# Altium PCB mRo_CANnode_V1_R1.PcbDoc
Units mm, origin at the board's own origin, x right, y up, seen from the top; angles counter-clockwise.
Board outline 25.25 x 21 mm, 4 copper layers (Top Layer, GND, VDD, Bottom Layer), stack 1.167 mm thick; 60 components, 35 nets, 197 pads, 80 vias.
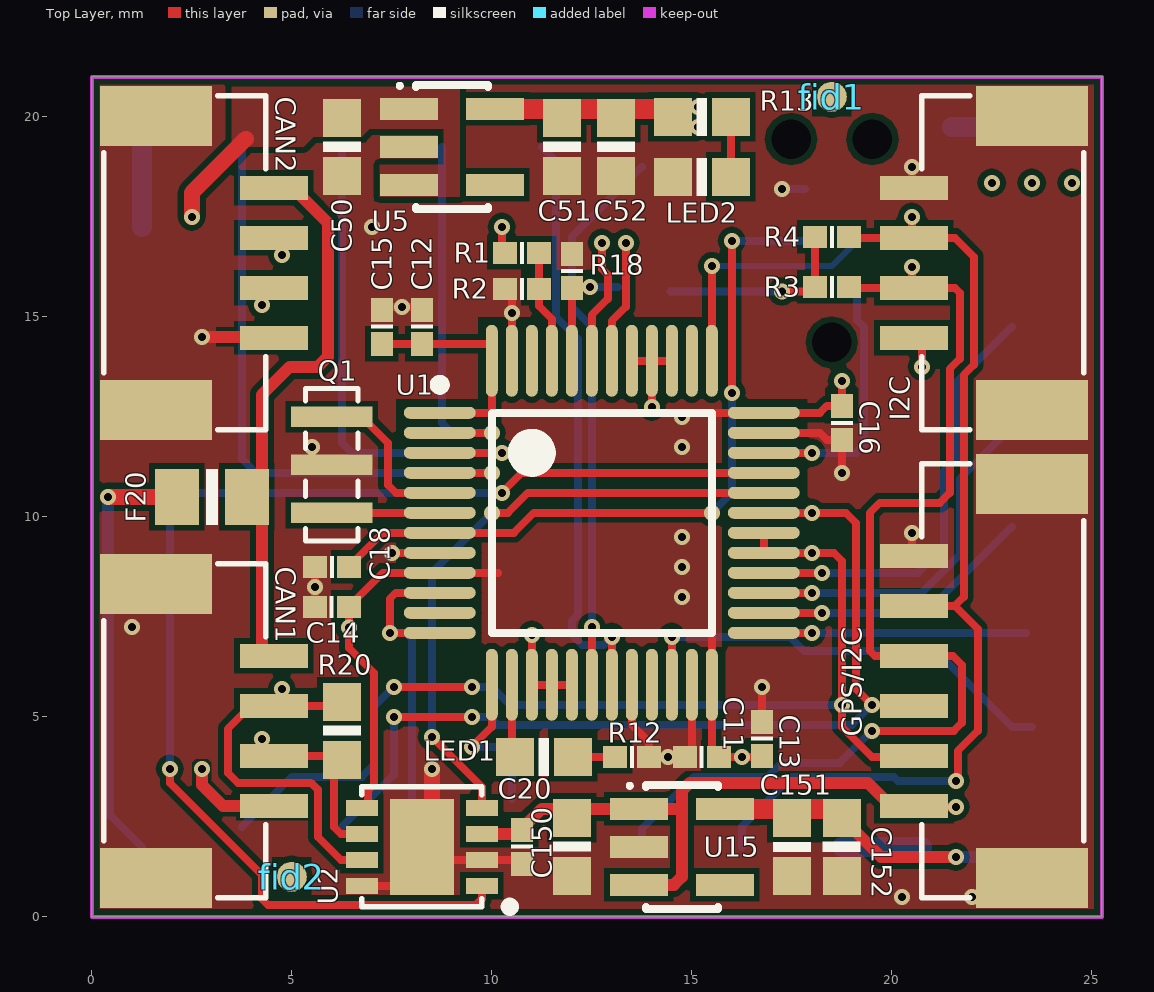
[diagram p0: Top Layer view]
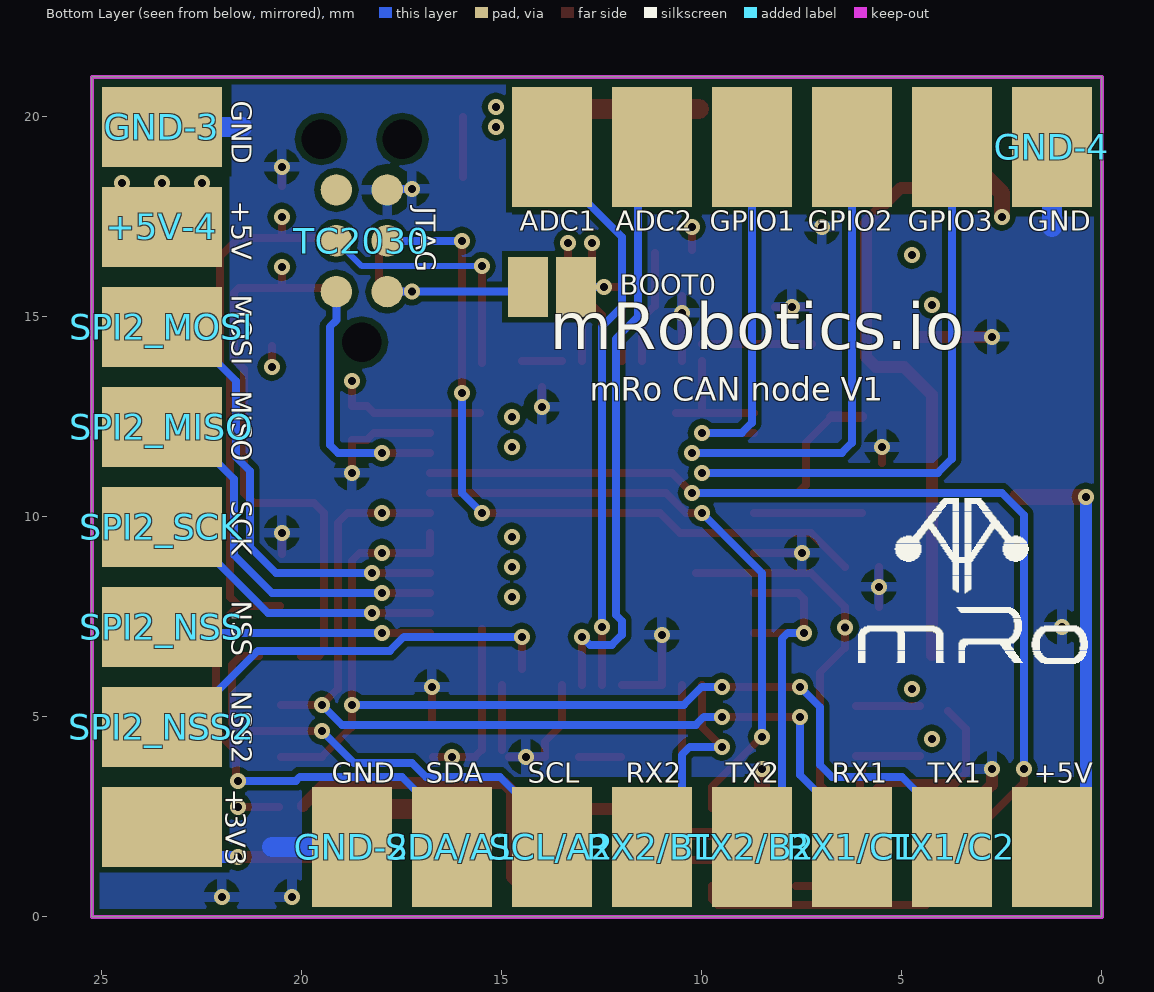
[diagram p1: Bottom Layer view, seen from below]
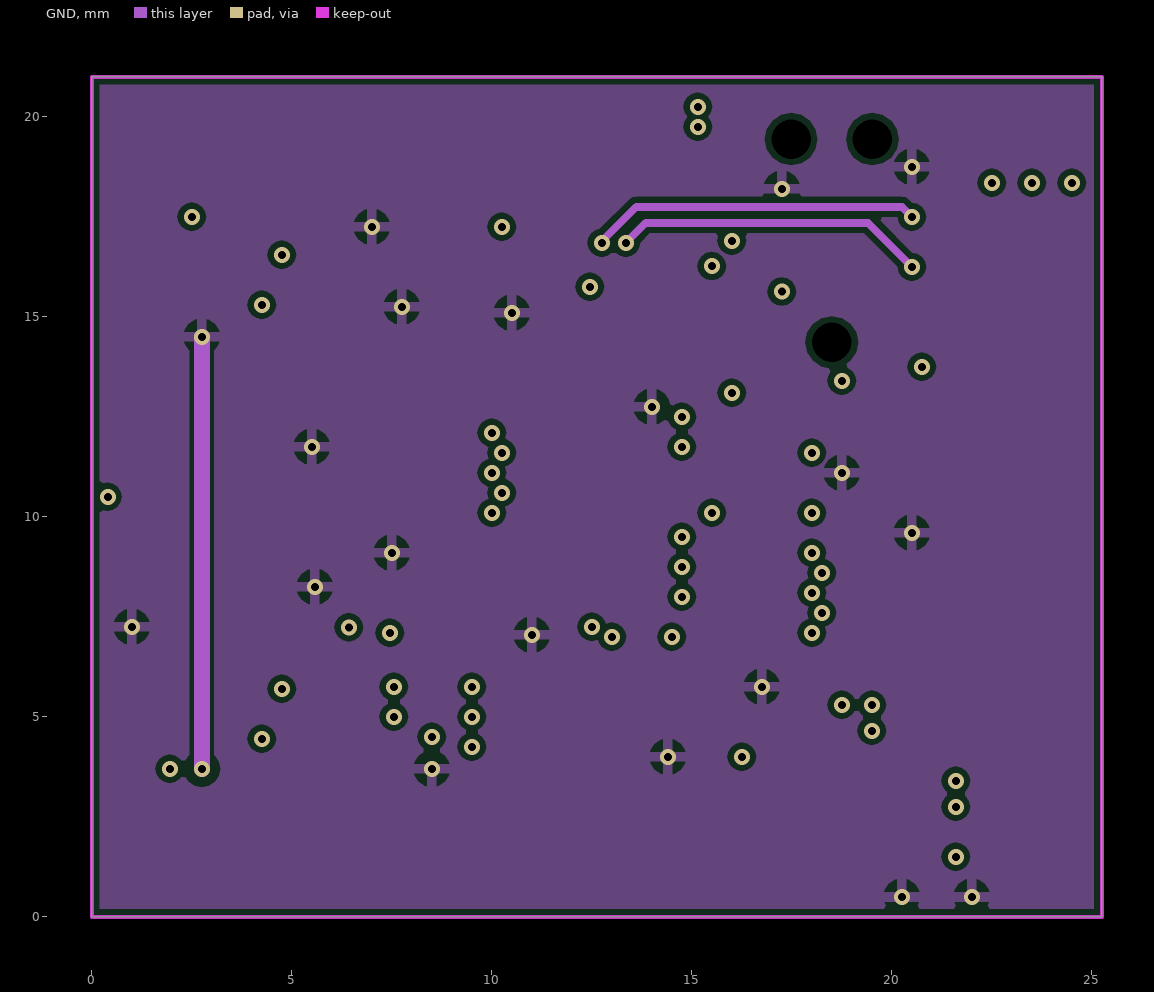
[diagram p2: GND]
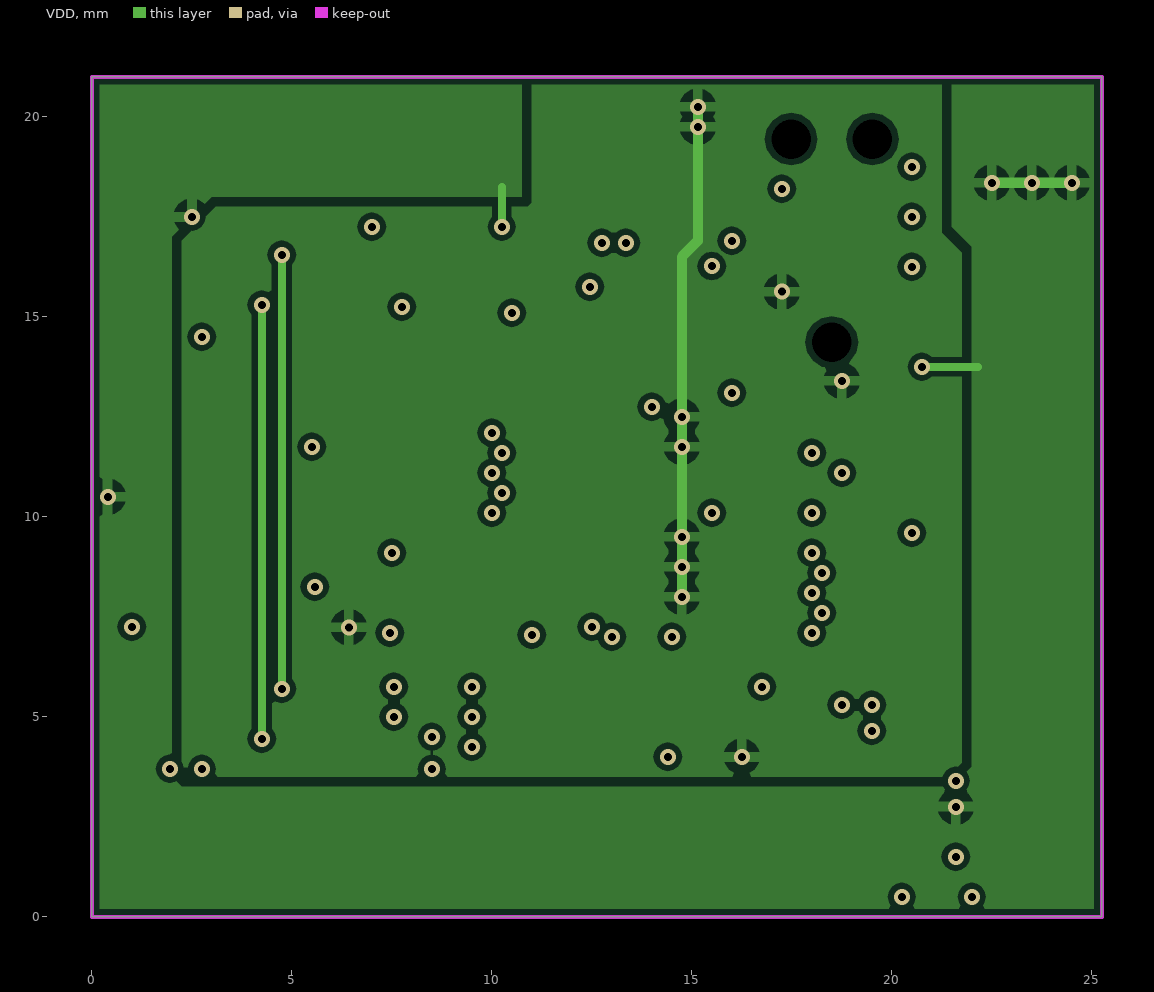
[diagram p3: VDD]

## Layer stack, top to bottom
Top Layer: signal copper 0.0356
Dielectric: core 0.35, FR-4, Dk 4.8
GND: signal copper 0.0356
Dielectric: prepreg 0.35, FR-4, Dk 4.8
VDD: signal copper 0.0356
Dielectric: core 0.325, FR-4, Dk 4.8
Bottom Layer: signal copper 0.0356

## Board outline
0,0 0,21 25.25,21 25.25,0

## Design rules (kind name [scope] priority, off if disabled: settings)
Clearance [All] p1: gap=0.15
PolygonConnect [All] p1: connectstyle=Relief reliefconductorwidth=0.25 reliefentries=4 polygonreliefangle="90 Angle" airgapwidth=0.25
RoutingVias [All] p1: holewidth=0.711 width=1.27 viastyle="Through Hole" minholewidth=0.711 minwidth=1.27 maxholewidth=0.711 maxwidth=1.27
SolderMaskExpansion [All] p1: expansion=0.102
Width [All] p1: maxlimit=0.2 minlimit=0.2 preferedwidth=0.2
28 further rules are at their usual default settings.

## Components (designator, comment, footprint, x,y, rotation, side; value= is the part's Value field where it differs from the comment)
+3V3 "+5V" SMD_TEST_PAD 23.5,2.25 r90 bottom
+5V "+5V" SMD_TEST_PAD 1.25,1.75 r0 bottom
+5V-4 "+5V" SMD_TEST_PAD 23.5,17.25 r90 bottom
ADC1 "GND" SMD_TEST_PAD 13.75,19.25 r0 bottom
ADC2 "GND" SMD_TEST_PAD 11.25,19.25 r0 bottom
BOOT0 "BLOB" "BLOB 2" 13.75,15.75 r180 bottom
C11 "100n 16V X7R" 0402A 15.25,4 r180 top
C12 "2u2 6.3V X5R" 0402A 8.25,14.75 r90 top
C13 "2u2 6.3V X5R" 0402A 16.75,4.45 r90 top
C14 "100n 16V X7R" 0402A 6,7.75 r180 top
C15 "100n 16V X7R" 0402A 7.25,14.75 r90 top (schematic designator C16)
C16 "100n 16V X7R" 0402A 18.75,12.35 r270 top
C18 "100n 16V X7R" 0402A 6,8.75 r180 top
C20 "2u2 6.3V X5R" 0402A 10.75,1.75 r270 top
C50 "10u 10V X5R" 0603A 6.25,19.25 r90 top
C51 "100n 16V X7R" 0603A 11.75,19.25 r90 top
C52 "10u 6.3V X5R" 0603A 13.1,19.25 r90 top
C150 "10u 10V X5R" 0603A 12,1.75 r90 top
C151 "100n 16V X7R" 0603A 17.5,1.75 r90 top
C152 "10u 6.3V X5R" 0603A 18.75,1.75 r90 top
CAN1 "SM04B-GHS-TB" SM04B-GHS-TB 4.85,4.65 r90 top locked
CAN2 "SM04B-GHS-TB" SM04B-GHS-TB 4.85,16.35 r90 top locked
F20 "250mA" 0805A 3,10.5 r0 top
fid1 "" SMT_PAD 18.5,20.5 r90 top
fid2 "" SMT_PAD 5,1 r90 top
GND-2 "GND" SMD_TEST_PAD 18.75,1.75 r180 bottom
GND-3 "GND" SMD_TEST_PAD 23.5,19.75 r90 bottom
GND-4 "GND" SMD_TEST_PAD 1.25,19.25 r0 bottom
GPIO1 "GPIO1" SMD_TEST_PAD 8.75,19.25 r0 bottom
GPIO2 "GPIO2" SMD_TEST_PAD 6.25,19.25 r0 bottom
GPIO3 "GPIO3" SMD_TEST_PAD 3.75,19.25 r0 bottom
GPS/I2C "SM06B-GHS-TB" SM06B-GHS-TB 20.25,5.9 r270 top locked
I2C "SM04B-GHS-TB" SM04B-GHS-TB 20.25,16.35 r270 top locked
LED1 "BLUE LED" 0603A 11.3,4 r0 top
LED2 "RED LED" 0603A 15.25,18.5 r180 top
Q1 "CSTCE8M00G55-R0" CERALOCK_RES 6,11.3 r270 top
R1 "2k 1%" 0402A 10.75,16.6 r0 top
R2 "3k3 1%" 0402A 10.75,15.7 r180 top
R3 "2k2 1%" 0402A 18.5,15.75 r180 top
R4 "2k2 1%" 0402A 18.5,17 r180 top
R12 "2.2k 1%" 0402A 13.5,4 r0 top
R13 "4.7k 1%" 0603A 15.25,20 r180 top
R18 "10k 1%" 0402A 12,16.15 r270 top
R20 "120R 1%" 0603A 6.25,4.65 r90 top
RX1/C1 "RX1" SMD_TEST_PAD 6.25,1.75 r0 bottom (schematic designator RX1/TLM/C1)
RX2/B1 "RX2" SMD_TEST_PAD 11.25,1.75 r0 bottom
SCL/A2 "SCL" SMD_TEST_PAD 13.75,1.75 r0 bottom
SDA/A1 "SDA" SMD_TEST_PAD 16.25,1.75 r0 bottom
SPI2_MISO "MISO" SMD_TEST_PAD 23.5,12.25 r270 bottom
SPI2_MOSI "MOSI" SMD_TEST_PAD 23.5,14.75 r270 bottom
SPI2_NSS "NSS" SMD_TEST_PAD 23.5,7.25 r270 bottom
SPI2_NSS2 "NSS2" SMD_TEST_PAD 23.5,4.75 r270 bottom
SPI2_SCK "SCK" SMD_TEST_PAD 23.5,9.75 r270 bottom
TC2030 "JTAG" JTAG_TC2030 18.5,16.9 r90 bottom
TX1/C2 "TX1" SMD_TEST_PAD 3.75,1.75 r0 bottom
TX2/B2 "TX2" SMD_TEST_PAD 8.75,1.75 r0 bottom
U1 "STM32F103CBT6" LQFP48_N 12.75,9.85 r0 top locked
U2 "TJA1051TK/3" 8DFN_3x3 8.25,1.75 r90 top
U5 "LP5907-Q1" SOT23-5 9,19.25 r270 top
U15 "LP5907-Q1" SOT23-5 14.75,1.75 r270 top

## Footprints (in the part's own frame and the unit in brackets; to place one, negate y for a bottom-side part, rotate by r counter-clockwise, add the part's x,y. Pads: shape width x height; smd on the part's side, far side on the other; paste and mask are expansions set on the pad)
8DFN_3x3 [mm]
  rect 0.4x0.8 smd mask+0.051: 1(-0.975,-1.5) 2(-0.325,-1.5) 3(0.325,-1.5) 4(0.975,-1.5) 5(0.975,1.5) 6(0.325,1.5) 7(-0.325,1.5) 8(-0.975,1.5)
  rect 2.4x1.6 smd paste-0.2 mask+0.051: EP(0,0)
  silkscreen extent -1.6,-2.3 1.5,1.5
0402A [mm]
  rect 0.6x0.55 smd mask+0.051: 1(0.425,0) 2(-0.425,0)
  silkscreen extent -0.05,-0.28 0.05,0.27
0603A [mm]
  rect 0.95x0.95 smd mask+0.051: 1(-0.725,0) 2(0.725,0)
  silkscreen extent -0.13,-0.48 0.13,0.47
0805A [mm]
  rect 1.1x1.4 smd mask+0.051: 1(0.875,0) 2(-0.875,0)
  silkscreen extent -0.15,-0.7 0.15,0.7
"BLOB 2" [mm]
  rect 1x1.5 smd mask+0.051: 1(-0.6,0) 2(0.6,0)
CERALOCK_RES [mil]
  rect 20x80 smd paste+0 mask+2: 1(-47.24,0) 2(0,0) 3(47.24,0)
  silkscreen extent -75,-26 75,26
JTAG_TC2030 [mil]
  round 31 smd paste-39.37 mask+2: 1(-50,-25) 2(-50,25) 3(0,-25) 4(0,25) 5(50,-25) 6(50,25)
  round 0 hole 39 unplated: ""(-100,0) ""(100,-40) ""(100,40)
LQFP48_N [mm] "Thin QFP, 48-Leads, Body 7x7mm, Pitch 0.5mm, IPC Medium Density"
  oval 1.8x0.3 smd: 1(-4.05,2.75) 2(-4.05,2.25) 3(-4.05,1.75) 4(-4.05,1.25) 5(-4.05,0.75) 6(-4.05,0.25) 7(-4.05,-0.25) 8(-4.05,-0.75) 9(-4.05,-1.25) 10(-4.05,-1.75) 11(-4.05,-2.25) 12(-4.05,-2.75) 25(4.05,-2.75) 26(4.05,-2.25) 27(4.05,-1.75) 28(4.05,-1.25) 29(4.05,-0.75) 30(4.05,-0.25) 31(4.05,0.25) 32(4.05,0.75) 33(4.05,1.25) 34(4.05,1.75) 35(4.05,2.25) 36(4.05,2.75)
  oval 0.3x1.8 smd: 13(-2.75,-4.05) 14(-2.25,-4.05) 15(-1.75,-4.05) 16(-1.25,-4.05) 17(-0.75,-4.05) 18(-0.25,-4.05) 19(0.25,-4.05) 20(0.75,-4.05) 21(1.25,-4.05) 22(1.75,-4.05) 23(2.25,-4.05) 24(2.75,-4.05) 37(2.75,4.05) 38(2.25,4.05) 39(1.75,4.05) 40(1.25,4.05) 41(0.75,4.05) 42(0.25,4.05) 43(-0.25,4.05) 44(-0.75,4.05) 45(-1.25,4.05) 46(-1.75,4.05) 47(-2.25,4.05) 48(-2.75,4.05)
  silkscreen extent -4.17,-2.75 2.75,3.57, body extent -3.5,-3.5 3.5,3.5, height 1.6
SM04B-GHS-TB [mm]
  rect 0.6x1.7 smd mask+0.051: 1(1.875,0.3) 2(0.625,0.3) 3(-0.625,0.3) 4(-1.875,0.3)
  rect 1.5x2.8 smd mask+0.051: GND(-3.675,3.25) GND(3.675,3.25)
  silkscreen extent -4.18,0.5 4.18,4.55
SM06B-GHS-TB [mm]
  rect 0.6x1.7 smd mask+0.051: 1(3.125,0.3) 2(1.875,0.3) 3(0.625,0.3) 4(-0.625,0.3) 5(-1.875,0.3) 6(-3.125,0.3)
  rect 1.5x2.8 smd mask+0.051: GND(-4.925,3.25) GND(4.925,3.25)
  silkscreen extent -5.43,0.5 5.43,4.55
SMD_TEST_PAD [mm]
  rect 2x3 smd paste-2 mask+0.05: 1(0,0)
SMT_PAD [mm]
  round 0.75 smd paste-0.635: 1(0,0)
SOT23-5 [mm] "SOT-23/SC-74A; 5 Leads; Body 3 x 3 mm, inc. leads (LxW max)"
  rect 0.55x1.45 smd: 1(-0.95,-1.075) 2(0,-1.075) 3(0.95,-1.075) 4(0.95,1.075) 5(-0.95,1.075)
  silkscreen extent -1.57,-1.35 1.55,0.9

## Part data
+3V3 +5V +5V-4 ADC1 ADC2 GND-2 GND-3 GND-4 GPIO1 GPIO2 GPIO3 RX1/C1 RX2/B1 SCL/A2 SDA/A1 SPI2_MISO SPI2_MOSI SPI2_NSS SPI2_NSS2 SPI2_SCK TX1/C2 TX2/B2: library part "Test pad"
C11 C12 C13 C14 C15 C16 C18 C20 C50 C51 C52 C150 C151 C152: library part Cap, "Capacitor"
CAN1 CAN2 I2C: library part "Header 4", "Header, 4-Pin"
F20: library part "Fuse 2", "Fuse"
fid1 fid2: library part Plug, "Plug"
GPS/I2C TC2030: library part "Header 6", "Header, 6-Pin"
LED1 LED2: library part LED0, "Typical INFRARED GaAs LED"
Q1: library part CERAMIC_RESONATOR_3PIN
R1 R2 R3 R4 R12 R13 R18 R20: library part Res2, "Resistor"
U1: "STM32 ARM-based 32-bit MCU with 128 Kbytes Flash, 48-pin LQFP, Industrial Temperature"
U2: library part TJA1051T

## Free pads (board coordinates)
  round 0 hole 0.3 unplated: 0(-0.1,9.75) 0(-0.1,10.25) 0(-0.1,10.75) 0(-0.1,11.25) 0(12,-0.1) 0(12,21.1) 0(12.5,-0.1) 0(12.5,21.1) 0(13,-0.1) 0(13,21.1) 0(13.5,-0.1) 0(13.5,21.1) 0(25.35,9.75) 0(25.35,10.25) 0(25.35,10.75) 0(25.35,11.25)

## Via types
v1: diameter 0.4, hole 0.2, Top Layer to Bottom Layer, tented both sides, 80 vias

## Nets (pads, with @x,y where several pads share a name; then routed paths per layer and width w, separated by ;. In a path a pad name is that pad's centre, name@x,y a point inside that pad or via, vN(x,y) a via of type N, cw(c..) or ccw(c..) an arc to the next point about the centre after c; other vN are vias at no path point)
+3V3: +3V3.1 C151.2 C152.2 U15.5 | length 7.1
  Top Layer w0.3: C152.2 19.725,1.5 v1(21.6,1.5)
  Top Layer w0.5: U15.5 C152.2@18.525,2.7
  Bottom Layer w0.3: v1(21.6,1.5) +3V3.1@22.75,1.5
+5V: +5V-4.1 +5V.1 C20.2 C50.2 C150.2 F20.2 GPS/I2C.1 I2C.1 R1.2 U2.3 U5.1 U5.3 U15.1 U15.3 | length 33.8
  Top Layer w0.2: R1.2@10.25,16.675 v1(10.25,17.25) ; GPS/I2C.1@20.575,2.75 v1(21.6,2.75) ; v1(20.75,13.75) I2C.1@20.75,14.275
  Top Layer w0.3: U2.3 C20.2@10.65,2.075 ; C20.2@10.75,2.2 11.25,2.7 U15.1 14.75,2.7 ; U15.3 14.55,0.8 14.75,1 14.75,3.15 14.95,3.35 19.4,3.35 GPS/I2C.1@19.975,2.775
  Top Layer w0.4: v1(0.4,10.5) F20.2 ; v1(2.5,17.5) 2.5,18.1 3.85,19.45
  VDD w0.2: v1(10.25,17.25) 10.25,18.25 ; v1(20.75,13.75) 22.15,13.75
  VDD w0.254: v1(22.5,18.35) v1(23.5,18.35) v1(24.5,18.35)
  Bottom Layer w0.2: +5V.1@0.4,2.6 +5V.1
  Bottom Layer w0.3: +5V.1@0.4,2.6 v1(0.4,10.5)
ADC1_IN8: ADC1.1 U1.18 | length 13.9
  Top Layer w0.2: U1.18 v1(12.5,7.25)
  Bottom Layer w0.2: v1(12.5,7.25) 12.5,14.75 12,15.25 12,17 ADC1.1@13.75,18.75
ADC1_IN9: ADC2.1 U1.19 | length 15
  Top Layer w0.2: U1.19 v1(13,7)
  Bottom Layer w0.2: ADC2.1 11.6,18.9 11.6,15 12.15,14.45 12.15,7.55 12,7.4 12,7.05 12.25,6.8 12.8,6.8 v1(13,7)
CAN5V: CAN1.1 CAN2.1 F20.1 | length 13.6
  Top Layer w0.3: CAN1.1@4.25,6.55 4.25,13.05 4.95,13.75 5.65,13.75 5.9,14 5.9,17.35 5.025,18.225 CAN2.1
CAN5VSENS: R1.1 R2.2 U1.45 | length 2.8
  Top Layer w0.2: R1.1 R2.2 11.175,15.275 11.5,14.95 U1.45
CAN_RX: U1.32 U2.4 | length 15.5
  Top Layer w0.2: v1(8.5,4.5) 9.75,3.25 U2.4 ; v1(10,10.1) 10.4,10.1 10.9,10.6 U1.32
  Bottom Layer w0.2: v1(8.5,4.5) 8.5,8.6 v1(10,10.1)
CAN_TX: U1.33 U2.1 | length 31.8
  Top Layer w0.2: v1(1.95,3.7) 1.95,3.35 4.25,1.05 4.25,0.45 4.4,0.3 9.6,0.3 9.75,0.45 U2.1 ; v1(10.25,10.6) 10.75,11.1 U1.33
  Bottom Layer w0.2: v1(1.95,3.7) 1.95,10.05 2.5,10.6 v1(10.25,10.6)
FMU_3V3: BOOT0.1 C11.2 C12.2 C13.2 C14.2 C15.2 C16.2 C51.2 C52.2 R3.1 R4.1 R13.2 TC2030.1 U1.1 U1.9 U1.24 U1.36 U1.48 U2.5 U5.5 | length 45.7
  Top Layer w0.2: U2.5 6.9,2.875 6.9,3.15 7.05,3.3 7.05,6.1 6.425,6.725 C14.2 7.275,8.6 10.15,8.6 ; C15.2 U1.48@10,14.325 ; U1.1 10,12.6 ; U1.48 10,12.6 ; 10.65,12.6 10,12.6 ; 15.5,7.2 15.5,4.175 C11.2 C13.2@16.725,4 ; 15.55,12.6 U1.36 18.2,12.6 18.375,12.775 C16.2 v1(18.75,13.4) ; v1(17.25,15.63) R3.1@17.955,15.63 ; R3.1 R4.1
  Top Layer w0.5: U5.5 R13.2@14.325,20.2
  VDD w0.25: v1(14.75,8) 14.75,16.5 15.15,16.9 v1(15.15,19.75) v1(15.15,20.25)
  Bottom Layer w0.2: BOOT0.1@14.47,15.63 v1(17.25,15.63) TC2030.1
  other v1: 16.25,4 6.425,7.237 14.75,8.75 14.75,9.5 14.75,11.75 14.75,12.5
GND: C11.1 C12.1 C13.1 C14.1 C15.1 C16.1 C18.1 C20.1 C50.1 C51.1 C52.1 C150.1 C151.1 C152.1 CAN1.4 CAN1.GND CAN2.4 CAN2.GND GND-2.1 GND-3.1 GND-4.1 GPS/I2C.6 GPS/I2C.GND I2C.4 I2C.GND LED2.2 Q1.2 R2.1 R12.1 R18.2 TC2030.5 U1.8 U1.15 U1.16 U1.17 U1.20 U1.23 U1.35 U1.39 U1.40 U1.41 U1.47 U2.2 U2.8 U2.EP U5.2 U15.2 | length 44.7
  Top Layer w0.2: CAN2.4@4.025,14.475 CAN2.4 ; Q1.2@5.5,11.35 v1(5.5,11.75) ; C14.1 C18.1 ; U2.8 U2.EP@7.65,0.775 ; C15.1@7.325,15.25 v1(7.75,15.25) C12.1@8.175,15.25 ; v1(7.5,9.1) U1.8 ; U2.EP@8.75,1.425 C20.1@10.65,1.425 ; U1.47 R2.1@10.5,15.525 ; v1(11,7.05) U1.15 U1.16 U1.17 ; U1.20 13.5,4.8 13.925,4.375 R12.1 C11.1 ; U1.41 U1.40 U1.39 ; v1(14,12.75) U1.40@14,13.25 ; C11.1@15,4.175 U1.23 ; C13.1 v1(16.75,5.75) ; U1.35 18.2,12.1 18.375,11.925 C16.1 v1(18.75,11.1) ; GPS/I2C.6@20.5,9.075 v1(20.5,9.6) ; I2C.4@20.5,18.275 v1(20.5,18.75)
  Top Layer w0.3: v1(2.75,3.7) 2.75,3.3 3.275,2.775 CAN1.4 ; v1(2.75,14.5) CAN2.4@4.55,14.5
  Top Layer w0.4: U2.EP@8.5,2 v1(8.5,3.7)
  GND w0.4: v1(2.75,3.7) v1(2.75,14.5)
  Bottom Layer w0.2: v1(17.25,18.2) TC2030.5@17.835,18.2
  Bottom Layer w0.5: 1.25,17.25 GND-4.1 ; GND-2.1 20.75,1.75 ; 21.5,19.75 GND-3.1
  other v1: 20.25,0.5 22,0.5 14.4,4 1,7.25 5.575,8.25 10.5,15.1 7,17.25
GPIO1: GPIO1.1 U1.2 | length 9.6
  Top Layer w0.2: U1.2 v1(10,12.1)
  Bottom Layer w0.2: GPIO1.1 8.75,12.35 9,12.1 v1(10,12.1)
GPIO2: GPIO2.1 U1.3 | length 13.1
  Top Layer w0.2: U1.3 v1(10.25,11.6)
  Bottom Layer w0.2: GPIO2.1 6.25,11.85 6.5,11.6 v1(10.25,11.6)
GPIO3: GPIO3.1 U1.4 | length 15.5
  Top Layer w0.2: U1.4 v1(10,11.1)
  Bottom Layer w0.2: GPIO3.1 3.75,11.45 4.1,11.1 v1(10,11.1)
LED1: LED1.1 U1.14 | length 1.7
  Top Layer w0.2: LED1.1@10.5,4.075 U1.14
NetBOOT0_2: BOOT0.2 R18.1 U1.44 | length 3
  Top Layer w0.2: U1.44 R18.1 ; R18.1@12.025,15.75 v1(12.45,15.75)
  Bottom Layer w0.2: v1(12.45,15.75) BOOT0.2
NetCAN1_2: CAN1.2 CAN2.2 R20.2 U2.7 | length 19.1
  Top Layer w0.2: CAN1.2@3.85,5.15 3.4,4.7 3.4,3.6 3.65,3.35 5.479,3.35 5.65,3.179 5.65,2 6.225,1.425 U2.7 ; CAN1.2 R20.2@6.15,5.275
  VDD w0.2: v1(4.75,5.7) v1(4.75,16.55)
NetCAN1_3: CAN1.3 CAN2.3 R20.1 U2.6 | length 14.7
  Top Layer w0.2: CAN1.3 R20.1@6.15,4.025 ; R20.1@6,3.675 6.05,3.625 6.05,2.25 6.225,2.075 U2.6
  VDD w0.2: v1(4.25,4.45) v1(4.25,15.3)
NetLED1_2: LED1.2 R12.2 | length 1
  Top Layer w0.2: LED1.2 R12.2
NetLED2_1: LED2.1 R13.1 | length 1.5
  Top Layer w0.2: LED2.1 R13.1
NetQ1_1: Q1.1 U1.5 | length 4.1
  Top Layer w0.2: Q1.1@6.75,12.5 7.4,11.85 7.4,10.8 7.6,10.6 U1.5
  Top Layer w0.254: Q1.1 Q1.1@6.75,12.5
NetQ1_3: Q1.3 U1.6 | length 2.7
  Top Layer w0.2: Q1.3 U1.6
NRST: C18.2 TC2030.3 U1.7 | length 18.5
  Top Layer w0.2: C18.2 7.275,9.6 U1.7 10.55,9.6 11.05,10.1 v1(15.5,10.1) ; v1(16,13.1) v1(16,16.9)
  Bottom Layer w0.2: v1(15.5,10.1) 16,10.6 v1(16,13.1) ; v1(16,16.9) TC2030.3
RX1/C1: GPS/I2C.3 RX1/C1.1 U1.31 | length 23.7
  Top Layer w0.2: v1(7.55,5) v1(9.5,5) ; U1.31 v1(18,10.1) 18.85,10.1 19.1,9.85 19.1,5.7 v1(19.5,5.3) GPS/I2C.3@20.525,5.3
  Bottom Layer w0.2: RX1/C1.1@6.25,2.25 7.55,3.55 v1(7.55,5) ; v1(9.5,5) 9.95,5 10.15,4.8 19,4.8 v1(19.5,5.3)
RX2/B1: RX2/B1.1 U1.13 | length 3.9
  Top Layer w0.2: v1(9.5,4.25) 10,4.75 U1.13
  Bottom Layer w0.2: v1(9.5,4.25) 10.3,4.25 10.5,4.05 RX2/B1.1@10.5,2.95
SCL/A2: GPS/I2C.4 I2C.2 R3.2 SCL/A2.1 U1.42 | length 37.3
  Top Layer w0.2: U1.42 13,14.9 13.35,15.25 v1(13.35,16.85) ; R3.2@18.95,15.725 I2C.2 21.575,15.725 21.7,15.6 21.7,13.95 21.45,13.7 21.45,10.6 21.2,10.35 19.7,10.35 19.45,10.1 19.45,6.65 19.575,6.525 GPS/I2C.4@20.025,6.525 ; v1(19.5,4.65) 21.55,4.65 21.75,4.85 21.75,6.3 21.525,6.525 GPS/I2C.4@21.075,6.525 ; I2C.2@20.5,15.775 v1(20.5,16.25)
  GND w0.2: v1(13.35,16.85) 13.85,17.35 19.4,17.35 v1(20.5,16.25)
  Bottom Layer w0.2: SCL/A2.1 13.75,2.2 15.05,3.5 16.9,3.5 17.25,3.85 18.34,3.85 18.7,3.85 v1(19.5,4.65)
SDA/A1: GPS/I2C.5 I2C.3 R4.2 SDA/A1.1 U1.43 | length 36.4
  Top Layer w0.2: U1.43 12.5,15.05 12.9,15.45 12.9,16.05 12.75,16.2 v1(12.75,16.85) ; R4.2@18.95,16.975 I2C.3 21.575,16.975 22.05,16.5 22.05,13.8 21.8,13.55 21.8,8 21.575,7.775 ; I2C.3@20.5,17.025 v1(20.5,17.5) ; GPS/I2C.5 21.575,7.775 ; v1(21.6,3.4) 21.65,3.45 21.65,4.15 22.15,4.65 22.15,7.2 21.575,7.775
  GND w0.2: v1@12.75,16.886 13.614,17.75 20.25,17.75 v1(20.5,17.5)
  VDD w0.2: v1(12.75,16.85) v1@12.75,16.886
  Bottom Layer w0.2: SDA/A1.1 16.25,2.25 17.5,3.5 20.05,3.5 20.15,3.4 v1(21.6,3.4)
SPI2_MISO: SPI2_MISO.1 U1.27 | length 9
  Top Layer w0.2: U1.27 v1(18,8.1)
  Bottom Layer w0.2: v1(18,8.1) 20.75,8.1 21.7,9.05 21.7,10.95 SPI2_MISO.1@23,12.25
SPI2_MOSI: SPI2_MOSI.1 U1.28 | length 11
  Top Layer w0.2: U1.28 v1(18.25,8.6)
  Bottom Layer w0.2: v1(18.25,8.6) 20.65,8.6 21.3,9.25 21.3,11.15 21.65,11.5 21.65,13.4 SPI2_MOSI.1@23,14.75
SPI2_NSS: SPI2_NSS.1 U1.25 | length 6.6
  Top Layer w0.2: U1.25 v1(18,7.1)
  Bottom Layer w0.2: v1(18,7.1) SPI2_NSS.1@23.35,7.1
SPI2_NSS2: SPI2_NSS2.1 U1.22 | length 10.7
  Top Layer w0.2: U1.22@14.5,6.2 v1(14.5,7)
  Bottom Layer w0.2: v1(14.5,7) 17.45,7 17.8,6.65 21.1,6.65 23,4.75 SPI2_NSS2.1
SPI2_SCK: SPI2_SCK.1 U1.26 | length 7.1
  Top Layer w0.2: U1.26 v1(18.25,7.6)
  Bottom Layer w0.2: v1(18.25,7.6) 20.85,7.6 SPI2_SCK.1@23,9.75
SWCLK: TC2030.4 U1.37 | length 6.3
  Top Layer w0.2: U1.37@15.5,13.85 v1(15.5,16.265)
  Bottom Layer w0.15: v1(15.5,16.265) 18.5,16.265 TC2030.4
SWDIO: TC2030.2 U1.34 | length 6.5
  Top Layer w0.2: U1.34 v1(18,11.6)
  Bottom Layer w0.2: v1(18,11.6) 19.1,11.6 19.3,11.8 19.3,14.75 19.135,14.915 TC2030.2
TX1/C2: GPS/I2C.2 TX1/C2.1 U1.29 U1.30 | length 26.3
  Top Layer w0.2: v1(7.55,5.75) v1(9.5,5.75) ; U1.30 U1.29 v1(18,9.1) 18.55,9.1 18.75,8.9 18.75,4.75 19.5,4 GPS/I2C.2@20.525,4
  Bottom Layer w0.2: TX1/C2.1@3.75,2.25 5,3.5 6.75,3.5 7.05,3.8 7.05,5.25 v1(7.55,5.75) ; v1(9.5,5.75) 10,5.75 10.45,5.3 v1(18.75,5.3)
TX2/B2: TX2/B2.1 U1.10 U1.12 | length 9.5
  Top Layer w0.2: U1.12 v1(7.45,7.1) 7.45,7.95 7.6,8.1 U1.10
  Bottom Layer w0.2: v1(7.45,7.1) 7.85,7.1 8,6.95 8,2.5 TX2/B2.1
pads on no net: fid1.1 fid2.1 TC2030. TC2030.6 U1.11 U1.21 U1.38 U1.46 U5.4 U15.4

## Polygon pours and split planes (outlines as drawn)
GND on Top Layer "Top Layer-No Net" (solid, remove dead copper, pour order 13): 0,21 25.25,21 25.25,0 0,0
FMU_3V3 on Top Layer "Top Layer-No Net" (solid, remove dead copper, pour order 7): 9.75,6.75 9.75,10 15.75,10 15.75,6.75
FMU_3V3 on Top Layer "Top Layer-No Net" (solid, remove dead copper, pour order 5): 10.25,13 10.25,11 15.75,11 15.75,13
+5V on Top Layer "Top Layer-No Net" (solid, remove dead copper, pour order 8): 3.5,20.75 9.2,20.75 9.2,18 7.2,18 7.2,18.8 8.8,18.8 8.8,19.7 6.95,19.7 6.75,19.5 5.55,19.5 5.3,19.25 3.5,19.25
FMU_3V3 on VDD "Top Layer-No Net" (solid, remove dead copper, pour order 11): 11,21 11,17.85 10.9,17.75 3.1,17.75 2.25,16.9 2.25,3.6 2.35,3.5 21.4,3.5 21.75,3.85 21.75,16.6 21.25,17.1 21.25,17.5 21.25,21
+5V on VDD "Top Layer-No Net" (solid, remove dead copper, pour order 6): 0,21 0,0 11.5,0 11.5,3.25 2.25,3.25 2,3.5 2,17 2.25,17.25 2.75,17.25 2.75,17.75 3,18 10.75,18 10.75,21 21.5,21 21.5,17.25 22,16.75 22,3.75 21.5,3.25 11.5,3.25 11.5,0 25.25,0 25.25,21
GND on GND "Top Layer-No Net" (solid, remove dead copper, pour order 15): 0,21 25.25,21 25.25,0 0,0
GND on Bottom Layer "Top Layer-No Net" (solid, remove dead copper, pour order 17): 0,21 25.25,21 25.25,0 0,0

## Keep-outs
Keep-Out Layer:
  the board outline again, w0.1

## Other copper
Top Layer:
  pour cut-out: 9.65,15 9.65,12.95 7.6,12.95 7.6,6.75 9.65,6.75 9.65,4.7 15.85,4.7 15.85,6.75 17.9,6.75 17.9,12.95 15.85,12.95 15.85,15
  pour cut-out: 3.1,14.75 3.1,14.25 3.55,14.25 3.55,14.05 5.5,14.05 5.5,14.9 3.55,14.9 3.55,14.75
  pour cut-out: 2.5,3.85 2.6,3.95 2.9,3.95 3,3.85 3,3.4 3.35,3.05 3.6,3.05 3.6,3.2 5.5,3.2 5.5,2.4 3.6,2.4 3.6,2.5 3.2,2.5 2.5,3.2
  pour cut-out: 18,21 18,20 19,20 19,21
  pour cut-out: 4.5,1.5 5.5,1.5 5.5,0.5 4.5,0.5
GND:
  pour cut-out: 2.45,14.15 3.05,14.15 3.05,3.55 2.9,3.4 2.6,3.4 2.45,3.55
Bottom Layer:
  pour cut-out: 25.25,18.5 21.8,18.5 21.8,1.1 25.25,1.1
  pour cut-out: 2.25,21 14.75,21 14.75,17.55 2.25,17.55
  pour cut-out: 0,3.5 17.75,3.5 17.75,0 0,0

## Silkscreen, mask and mechanical layers (free items; w line width, h text height)
Bottom Overlay:
  drawing of 579 lines, arcs and shapes, not listed
  text "mRobotics.io" at 13.8,13.8 h2
  text "mRo CAN node V1" at 12.8,12.7 h1
Top Solder:
  rectangle: 4.5,0.5 5.5,1.5
  rectangle: 18,20 19,21
Mechanical 15:
  lines w2: -1,8.75 -1,-1 11,-1 ; -1,12.25 -1,22 11,22 ; 14.5,-1 26.25,-1 26.25,8.75 ; 14.5,22 26.25,22 26.25,12.25